# Altium PCB Grabber_DIOT.PCBDOC (part 2 of 7)
Units mm, origin at the board's own origin, x right, y up, seen from the top; angles counter-clockwise.
Board outline 221.14 x 100 mm, 4 copper layers (TopLayer, MidLayer1, Internal layer GND, Bottom Layer), stack 1.607 mm thick; 234 components, 170 nets, 1025 pads, 389 vias.
Unrouted connection lines stored in the file: 2.
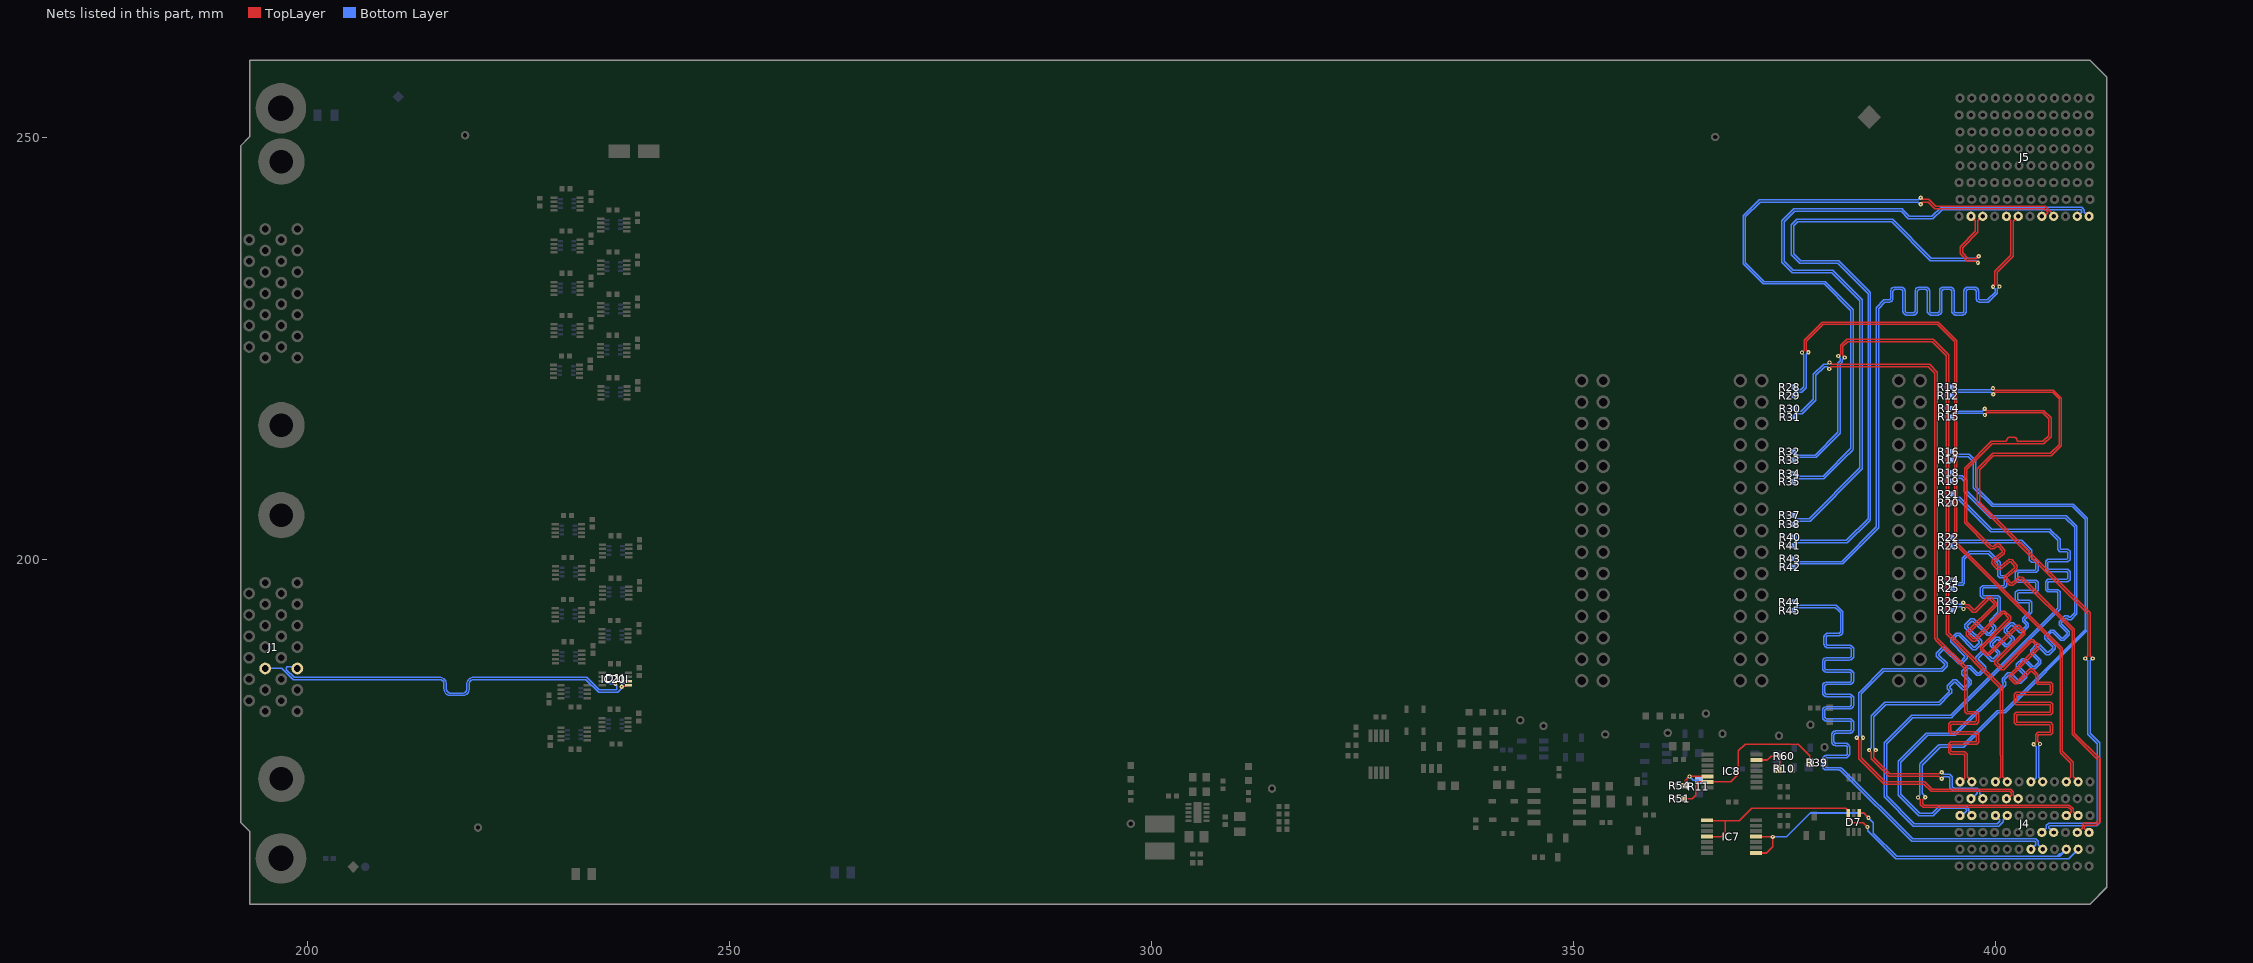
[diagram p4: the nets of this part, all layers, seen from the top]

## Part data
B1 B2 B3 B4 B5 B6 B7 B8 B9 B10 B11 B14 B15 B16: library part PLATED_HOLE0.6_PAD1.3, "Single Terminal Socket", Author="CERN DEM MR", ComponentHeight=0mm, Component Type="Standard (No BOM)", CreateDate=02.03.2016, Family="Plated Hole", HelpURL=Undefined, LatestRevisionDate=02.03.2016, Mounted=No, PackageDescription="Plated Through Hole: Hole Dia.=0.6mm Pad Dia.=1.3mm", Part Description="Plated Through Hole: Hole Dia.=0.6mm Pad Dia.=1.3mm", Part Number=PLATED_HOLE0.6_PAD1.3, Pin Count=1, Sense=No, SMD=No, Socket=No, Status=None
C1: library part CC0402_22PF_50V_5%_C0G, "Non-polarised capacitor", Case=0402, Manufacturer=GENERIC, Manufacturer1 ComponentHeight=0.55mm, Manufacturer1 Example=KEMET, Manufacturer1 Part Number=C0402C220J5GACTU, Tolerance=±5%, Voltage=50V, Author="CERN DEM JLC", Component Type=Standard, CreateDate=2007-12-03, HelpURL="\\cern.ch\dfs\Applications\Altium\Datasheets\CC0402_C0G_KEMET_(Commercial Grade).pdf", LatestRevisionDate=2007-12-03, Manufacturer Part Number=CC0402_22PF_50V_5%_C0G, Mounted=Yes, Part Description="SMD Multilayer Chip Ceramic Capacitor", Part Number=CC0402_22PF_50V_5%_C0G, Pin Count=2, Sense=No, SMD=Yes, Socket=No, Status=Preferred, TC=C0G/NP0
C2 C3 C14 C16 C17 C47A C47B C47C C47D C47E C47F C47G C47H C47I C47J C47K C47L C47M C47N C47O C47P C47Q C47R C47S C47T C47U C58 C59 C64 C65 C67: library part CC0402_100NF_16V_10%_X5R, "Non-polarised capacitor", Case=0402, Manufacturer=GENERIC, Manufacturer1 ComponentHeight=0.55mm, Manufacturer1 Example=MURATA, Manufacturer1 Part Number=GRM155R61C104KA88D, Tolerance=±10%, Voltage=16V, Author="CERN DEM JLC", Component Type=Standard, CreateDate=10.12.2013, HelpURL=\\cern.ch\dfs\Applications\Altium\Datasheets\CC0402_X5R_MURATA_GRM.pdf, LatestRevisionDate=10.12.2013, Manufacturer Part Number=CC0402_100NF_16V_10%_X5R, Mounted=Yes, Part Description="SMD Multilayer Chip Ceramic Capacitor", Part Number=CC0402_100NF_16V_10%_X5R, Pin Count=2, Sense=No, SMD=Yes, Socket=No, Status=None, TC=X5R
C9 C10: library part CC0603_1UF_25V_10%_X7R, "Non-polarised capacitor", Case=0603, Manufacturer=GENERIC, Manufacturer1 ComponentHeight=0.9mm, Manufacturer1 Example=MURATA, Manufacturer1 Part Number=GRM188R71E105KA12D, Tolerance=±10%, Voltage=25V, Author="CERN DEM JLC", Component Type=Standard, CreateDate=18.01.2011, HelpURL=\\cern.ch\dfs\Applications\Altium\Datasheets\CC0603_X7R_MURATA.pdf, LatestRevisionDate=18.01.2011, Manufacturer Part Number=CC0603_1UF_25V_10%_X7R, Mounted=Yes, Part Description="SMD Multilayer Chip Ceramic Capacitor", Part Number=CC0603_1UF_25V_10%_X7R, Pin Count=2, Sense=No, SMD=Yes, Socket=No, Status=None, TC=X7R
C11: library part CC0603_22UF_6.3V_20%_X5R, "Non-polarised capacitor", Case=0603, Manufacturer=GENERIC, Manufacturer1 ComponentHeight=0.9mm, Manufacturer1 Example=TDK, Manufacturer1 Part Number=C1608X5R0J226M080, Tolerance=±20%, Voltage=6.3V, Author="CERN DEM JLC", Component Type=Standard, CreateDate=16.12.2013, HelpURL=\\cern.ch\dfs\Applications\Altium\Datasheets\CC0603_X5R_TDK_C.pdf, LatestRevisionDate=03.12.2020, Manufacturer Part Number=CC0603_22UF_6.3V_20%_X5R, Mounted=Yes, Part Description="SMD Multilayer Chip Ceramic Capacitor", Part Number=CC0603_22UF_6.3V_20%_X5R, Pin Count=2, Sense=No, SMD=Yes, Socket=No, Status=None, TC=X5R
C12: library part CC0603_100NF_50V_10%_X7R, "Non-polarised capacitor", Case=0603, Manufacturer=GENERIC, Manufacturer1 ComponentHeight=0.87mm, Manufacturer1 Example=PHYCOMP, Manufacturer1 Part Number=223858615649, Tolerance=±10%, Voltage=50V, Author="CERN DEM JLC", Component Type=Standard, CreateDate=03.12.2007, HelpURL=\\cern.ch\dfs\Applications\Altium\Datasheets\CC0603_X7R_PHYCOMP.pdf, LatestRevisionDate=03.12.2007, Manufacturer Part Number=CC0603_100NF_50V_10%_X7R, Mounted=Yes, Part Description="SMD Multilayer Chip Ceramic Capacitor", Part Number=CC0603_100NF_50V_10%_X7R, Pin Count=2, Sense=No, SMD=Yes, Socket=No, Status=Preferred, TC=X7R
C13 C66 C68: library part CC0805_22UF_16V_10%_X5R, "Non-polarised capacitor", Case=0805, Manufacturer=GENERIC, Manufacturer1 ComponentHeight=1.35mm, Manufacturer1 Example=TDK, Manufacturer1 Part Number=C2012X5R1C226KT, Tolerance=±10%, Voltage=16V, Author="CERN DEM JLC", Component Type=Standard, CreateDate=25.10.2012, HelpURL=\\cern.ch\dfs\Applications\Altium\Datasheets\CC0805_X5R_TDK_C.pdf, LatestRevisionDate=25.10.2012, Manufacturer Part Number=CC0805_22UF_16V_10%_X5R, Mounted=Yes, Part Description="SMD Multilayer Chip Ceramic Capacitor", Part Number=CC0805_22UF_16V_10%_X5R, Pin Count=2, Sense=No, SMD=Yes, Socket=No, Status=Preferred, TC=X5R
C15: library part CC0603_1UF_16V_10%_X7R, "Non-polarised capacitor", Case=0603, Manufacturer=GENERIC, Manufacturer1 ComponentHeight=0.9mm, Manufacturer1 Example="YAGEO PHYCOMP", Manufacturer1 Part Number=223878615663, Tolerance=±10%, Voltage=16V, Author="CERN DEM JLC", Component Type=Standard, CreateDate=03.12.2007, HelpURL=\\cern.ch\dfs\Applications\Altium\Datasheets\CC0603_X7R_PHYCOMP.pdf, LatestRevisionDate=17.04.2015, Manufacturer Part Number=CC0603_1UF_16V_10%_X7R, Mounted=Yes, Part Description="SMD Multilayer Chip Ceramic Capacitor", Part Number=CC0603_1UF_16V_10%_X7R, Pin Count=2, Sense=No, SMD=Yes, Socket=No, Status=None, TC=X7R
C62: library part CAE430-540_10UF_16V_20%, "Polarised capacitor", Case=B, Manufacturer=PANASONIC, Manufacturer Part Number=EEEFK1C100AR, Tolerance=±20%, Voltage=16V, Author="CERN DEM JLC", ComponentHeight=5.8mm, Component Type=Standard, CreateDate=03.12.2007, HelpURL=\\cern.ch\dfs\Applications\Altium\Datasheets\CAE_PANASONIC_FK.pdf, LatestRevisionDate=05.11.2014, Mounted=Yes, Part Description="Aluminum Electrolytic SMT Capacitor", Part Number=CAE430-540_10UF_16V_20%, Pin Count=2, Sense=No, SMD=Yes, Socket=No, Status="Not Recommended"
D1A D1B D1C D1D D1E D1F D1G D1H D1I D1J D1K D1L D1M D1N D1O D1P D1Q D1R D1S D1T D1U: "ESD Protection Diodes Array (8kV) with Low Clamping Voltage", Manufacturer="ON SEMICONDUCTOR", Voltage=5.5V, Author="CERN DEM JLC", Bonding=No, ComponentHeight=1.75mm, Component Type=Standard, CreateDate=05.12.2012, Device=NUP4114UPXV6T1G, HelpURL=\\cern.ch\dfs\Applications\Altium\Datasheets\NUP4114UPXV6T1G.pdf, LatestRevisionDate=05.12.2012, Manufacturer Part Number=NUP4114UPXV6T1G, Mounted=Yes, PackageDescription="SOTFL (SOT666, SOT563,), 0.50mm, Pitch; 6 Pin, 1.20mm W X 1.60mm L X 0.60mm H Body, IPC Medium Density", Part Description="ESD Protection Diodes Array (8kV) with Low Clamping Voltage", Part Number=NUP4114UPXV6T1G, Pin Count=8, PressFit=No, Sense=No, SMD=Yes, Socket=No
D2 D3 D4: "Ultra Low Capacitance Double Rail-to-Rail ESD Protection Diode", Case=SOT143B, Manufacturer="NXP SEMICONDUCTORS", Voltage=5.5V, Author="CERN DEM JLC", Bonding=No, Component Type=Standard, ComponentHeight=1.1mm, CreateDate=22.03.2011, Device=PRTR5V0U2X, HelpURL=\\cern.ch\dfs\Applications\Altium\Datasheets\PRTR5V0U2X.pdf, LatestRevisionDate=22.03.2011, Manufacturer Part Number=PRTR5V0U2X, Mounted=Yes, PackageDescription="SOT143B, SOT, 1.90mm Pitch; 4 Pin, 1.30mm W X 2.90mm L X 1.10mm H body, IPC Medium Density", Part Description="Ultra Low Capacitance (1pF) Double Rail-to-Rail ESD Protection Diode (8kV)", Part Number=PRTR5V0U2X, Pin Count=4, PressFit=No, Sense=No, SMD=Yes, Socket=No
D5 D6 D9 D10: "Schottky Diode", Case=SOD323, Manufacturer=INFINEON, Power=750mA, Voltage=40V, Author="CERN DEM JLC", Bonding=No, Component Type=Standard, ComponentHeight=1.1mm, CreateDate=12.11.2014, Device=BAT165, HelpURL=\\cern.ch\dfs\Applications\Altium\Datasheets\BAT165.pdf, LatestRevisionDate=12.11.2014, Manufacturer Part Number=BAT165, Mounted=Yes, PackageDescription="Small Outline Diode (SOD-323), 1.70mm W X 1.25mm L X 1.10mm H body,  IPC Medium Density", Part Description="Medium Power AF Schottky Diode", Part Number=BAT165, Pin Count=2, PressFit=No, Sense=No, SMD=Yes, Socket=No
D7 D8: "Fivefold ESD Protection Diode Arrays", Case=SOT363, Manufacturer=NEXPERIA, Power=200W, Voltage=3.3V, Author="CERN DEM WB", Bonding=No, Component Type=Standard, ComponentHeight=1.1mm, CreateDate=05.07.2021, Device=PESD3V3L5UY, HelpURL=\\cern.ch\dfs\Applications\Altium\Datasheets\PESD3V3L5UY.pdf, LatestRevisionDate=05.07.2021, Manufacturer Part Number=PESD3V3L5UY, Mounted=Yes, PackageDescription="SOT363, SC-88, 0.65mm Pitch; 6 Pin, 1.25mm W X 2.00mm L X 1.10mm H body, IPC Medium Density", Part Description="Fivefold ESD Protection Diode Arrays (30kV)", Part Number=PESD3V3L5UY, Pin Count=6, PressFit=No, Sense=No, SMD=Yes, Socket=No
FTG21: library part FIDUCIAL_TARGET_C100-200, "Fiducial Target", Author="CERN DEM JLC", ComponentHeight=0mm, Component Type="Standard (No BOM)", CreateDate=09.02.2010, Family=Fiducial, HelpURL=Undefined, LatestRevisionDate=04.04.2012, Mounted=No, PackageDescription="Round Fiducial Target, Top Layer, 1.0mm, Top Solder 2.0mm, Keepout =2.0mm", Part Description="Round Fiducial Target, Top Layer, 1.0mm, Top Solder 2.0mm, Keepout =2.0mm", Part Number=FIDUCIAL_TARGET_C100-200, Pin Count=1, Sense=No, SMD=Yes, Socket=No, Status=None
FTG22 FTG24: library part FIDUCIAL_TARGET_S100-200, "Fiducial Target", Author="CERN DEM JLC", ComponentHeight=0mm, Component Type="Standard (No BOM)", CreateDate=09.02.2010, Family=Fiducial, HelpURL=Undefined, LatestRevisionDate=04.04.2012, Mounted=No, PackageDescription="Square Fiducial Target, Top Layer, 1.0mm, Top Solder 2.0mm, Keepout =2.0mm", Part Description="Square Fiducial Target, Top Layer, 1.0mm, Top Solder 2.0mm, Keepout =2.0mm", Part Number=FIDUCIAL_TARGET_S100-200, Pin Count=1, Sense=No, SMD=Yes, Socket=No, Status=None
FTG23: library part FIDUCIAL_TARGET_S200-400, "Fiducial Target", Author="CERN DEM JLC", ComponentHeight=0mm, Component Type="Standard (No BOM)", CreateDate=02.06.2008, Family=Fiducial, HelpURL=Undefined, LatestRevisionDate=04.04.2012, Mounted=No, PackageDescription="Square Fiducial Target, Top Layer, 2.0mm, Top Solder 4.0mm, Keepout =4.0mm", Part Description="Square Fiducial Target, Top Layer, 2.0mm, Top Solder 4.0mm, Keepout =4.0mm", Part Number=FIDUCIAL_TARGET_S200-400, Pin Count=1, Sense=No, SMD=Yes, Socket=No, Status=None
IC1 IC24 IC26: "1.7V-5.5V, 2K I2C Serial EEPROM With EUI-48 Node Identity", Case=SOT23-5, Manufacturer="MICROCHIP TECHNOLOGY", Author="CERN DEM MR", Bonding=No, ComponentHeight=1.45mm, Component Type=Standard, CreateDate=31.03.2016, Device=24AA02E48T-I/OT, HelpURL=\\cern.ch\dfs\Applications\Altium\Datasheets\24AA02E48T-I-OT.pdf, LatestRevisionDate=31.03.2016, Manufacturer Part Number=24AA02E48T-I/OT, Mounted=Yes, PackageDescription="SOT, 0.95mm pitch; 5 pin, 1.60mm W X 2.90mm L X 1.45mm H body, IPC Medium Density", Part Description="1.7V-5.5V, 2K I2C Serial EEPROM With EUI-48 Node Identity", Part Number=24AA02E48T-I/OT, Pin Count=5, PressFit=No, Sense=No, SMD=Yes, Socket=No
IC2: "Digital Temperature Sensor and Thermal Watchdog with Two-Wire Interface", Case=SSOP8, Manufacturer="TEXAS INSTRUMENTS", Author="CERN DEM JLC", Bonding=No, Component Type=Standard, ComponentHeight=1.09mm, CreateDate=15.10.2012, Device=LM75AIMM/NOPB, HelpURL=\\cern.ch\dfs\Applications\Altium\Datasheets\LM75AIMM-NOPB.pdf, LatestRevisionDate=15.10.2012, Manufacturer Part Number=LM75AIMM/NOPB, Mounted=Yes, PackageDescription="SOP, 0.65mm pitch; 8 pin,3.00mm W X 3.00mm L X 1.09mm H bodyI, PC Medium Density", Part Description="-25° to +100°C ±2°C Digital Temperature Sensor and Thermal Watchdog with Two-Wire Interface", Part Number=LM75AIMM/NOPB, Pin Count=8, PressFit=No, Sense=No, SMD=Yes, Socket=No
IC6: "500mA Peak Output LDO Regulator", Case=SOT23-5, Manufacturer="MICROCHIP TECHNOLOGY", Author="CERN DEM WB", Bonding=No, Component Type=Standard, ComponentHeight=1.45mm, CreateDate=2019-04-16, Device=MIC5219-3.3YM5, HelpURL=\\cern.ch\dfs\Applications\Altium\Datasheets\MIC5219-3.3YM5.pdf, LatestRevisionDate=2019-04-16, Manufacturer Part Number=MIC5219-3.3YM5, Mounted=Yes, PackageDescription="SOT, 0.95mm pitch; 5 pin, 1.60mm W X 2.90mm L X 1.45mm H body, IPC Medium Density", Part Description="3.3V 500mA Peak Output Low Drop-Out  (LDO) Regulator", Part Number=MIC5219-3.3YM5, Pin Count=5, PressFit=No, Sense=No, SMD=Yes, Socket=No
IC7 IC8: Case=TSSOP14, Manufacturer="NXP SEMICONDUCTORS", Author="CERN DEM JLC", Bonding=No, Component Type=Standard, ComponentHeight=1.1mm, Device=74HC4066PW, HelpURL=\\cern.ch\dfs\Applications\Altium\Datasheets\74HC4066PW.pdf, Manufacturer Part Number=74HC4066PW, Mounted=Yes, Part Description="Quad Single-Pole Single-Throw Analog Switch", Part Number=74HC4066PW, Pin Count=14, PressFit=No, SMD=Yes, Socket=No
  IC7: CreateDate=19.11.2014, LatestRevisionDate=19.11.2014, PackageDescription="SOP, 0.65mm Pitch; 14 Pin, 4.40mm W X 5.00mm L X 1.20mm H body, IPC Medium Density", Sense=No
  IC8: CreateDate=2014-11-19, LatestRevisionDate=2014-11-19, PackageDescription="SOP, 14-Leads, Body 4.4x5mm (max), Pitch 0.65mm, IPC Medium Density", Table="Standard Logic"
IC9: "LinCMOS Timer", Case=SOIC8, Manufacturer="TEXAS INSTRUMENTS", Author="CERN DEM JMW", Bonding=No, Component Type=Standard, ComponentHeight=1.75mm, CreateDate=23.08.2016, Device=TLC555ID, HelpURL=\\cern.ch\dfs\Applications\Altium\Datasheets\TLC555ID.pdf, LatestRevisionDate=23.08.2016, Manufacturer Part Number=TLC555ID, Mounted=Yes, PackageDescription="SOIC 8, Pitch 1.27mm, Body 4x5mm, IPC Medium Density", Part Description="LinCMOS Timer", Part Number=TLC555ID, Pin Count=8, PressFit=No, Sense=No, SMD=Yes, Socket=No
IC20A IC20B IC20C IC20D IC20E IC20F IC20G IC20H IC20I IC20J IC20K IC20L IC20M IC20N IC20O IC20P IC20Q IC20R IC20S IC20T IC20U: "LVDS Single Port High Speed Repeater", Case=TSSOP8, Manufacturer="FAIRCHILD SEMICONDUCTOR", Author="CERN DEM JLC", Bonding=No, ComponentHeight=0.8mm, Component Type=Standard, CreateDate=08.11.2016, Device=FIN1101K8X, HelpURL=\\cern.ch\dfs\Applications\Altium\Datasheets\FIN1101K8X.pdf, LatestRevisionDate=08.11.2016, Manufacturer Part Number=FIN1101K8X, Mounted=Yes, PackageDescription="SOP, 0.50mm Pitch; 8 pin, 2.30mm W X 2.00mm L X 0.90mm H body, PC Medium Density", Part Description="LVDS Single Port High Speed Repeater", Part Number=FIN1101K8X, Pin Count=8, PressFit=No, Sense=No, SMD=Yes, Socket=No
IC27: "4.75-28VDC to 1-6VDC, 500mA Step-Down Converter With Sleep Mode", Case=SON10, Manufacturer="TEXAS INSTRUMENTS", Author="CERN DEM JMW", Bonding=No, ComponentHeight=0.8mm, Component Type=Standard, CreateDate=11.08.2015, Device=TPS62175DQC, HelpURL=\\cern.ch\dfs\Applications\Altium\Datasheets\TPS62175DQC.pdf, LatestRevisionDate=11.08.2015, Manufacturer Part Number=TPS62175DQC, Mounted=Yes, PackageDescription="SON, 10-Leads, Body 2x3mm, Pitch 0.5mm, Thermal Pad 0.94x2.5mm, IPC Medium Density", Part Description="4.75-28VDC to 1-6VDC, 500mA Step-Down Converter With Sleep Mode", Part Number=TPS62175DQC, Pin Count=11, PressFit=No, Sense=No, SMD=Yes, Socket=No
J1 J2: library part 3M_N10226-5212PC, "Connector Mini D Ribbon (MDR) 26 Female", Manufacturer=3M, Author="CERN DEM JLC", Component Type=Standard, ComponentHeight=9.4mm, CreateDate=18.11.2008, Family="MDR 26", HelpURL=\\cern.ch\dfs\Applications\Altium\Datasheets\3M_N10226-5212PC.pdf, LatestRevisionDate=14.10.2009, Manufacturer Part Number=N10226-5212PC, Mounted=Yes, Part Description="26 contacts, Mini D Ribbon (MDR), .050\" Boardmount Through-hole Right Angle Receptacle-Shielded, Diecast Body, 102 Series", Part Number=N10226-5212PC, Pin Count=28, PressFit=No, Sense=No, SMD=No, Socket=No, Status=None
J3 J14 J24: library part 3M_N2530-6002RB, "30 Contacts - Straight .100'' x .100'' Low Profile Four-Wall Header, 2500 Series", Manufacturer=3M, Author="CERN DEM JLC", ComponentHeight=10.03mm, Component Type=Standard, CreateDate=11.02.2009, Family="Header 30", HelpURL=\\cern.ch\dfs\Applications\Altium\Datasheets\3M_N2530-6002RB.pdf, LatestRevisionDate=11.08.2009, Manufacturer Part Number=N2530-6002RB, Mounted=Yes, Part Description="30 Contacts - Straight .100'' x .100'' Low Profile Four-Wall Header, 2500 Series", Part Number=3M_N2530-6002RB, Pin Count=30, PressFit=No, Sense=No, SMD=No, Socket=No, Status=None
J4: library part AMPHENOL_10052825-101LF, "72 Contacts Header, 6 Columns, 4 Pairs per Column", Manufacturer=AMPHENOL, Part Number=10052825-101LF
J5: library part AMPHENOL_10052838-101LF, "96 Contacts Header, 8 Columns, 4 Pairs per Column", Manufacturer=AMPHENOL, Part Number=10052838-101LF
L2: library part IND_10UH_10%_MURATA-PS_8400, "Inductor With Core", Manufacturer="MURATA POWER SOLUTIONS", Manufacturer Part Number=84103C, Power=950mA, Resistance=0.24R, Tolerance=±10%, Author="CERN DEM JLC", ComponentHeight=2.9mm, Component Type=Standard, CreateDate=02.07.2012, HelpURL=\\cern.ch\dfs\Applications\Altium\Datasheets\IND_MURATA-PS_8400.pdf, LatestRevisionDate=02.07.2012, Mounted=Yes, Part Description="Miniature Surface Mount Power Inductor (8400 Serie)", Part Number=IND_10UH_10%_MURATA-PS_8400, Pin Count=2, Sense=No, SMD=Yes, Socket=No, Status=None
LD1 LD5 LD6 LD7 LD8: library part LED_KINGBRIGHT_KPH-1608CGCK, "LED Green 1C 2A", Manufacturer=KINGBRIGHT, Manufacturer Part Number=KPH-1608CGCK, Author="CERN DEM JLC", Bonding=No, Color=Green, Component Type=Standard, ComponentHeight=0.65mm, CreateDate=03.07.2017, HelpURL=\\cern.ch\dfs\Applications\Altium\Datasheets\LED_KINGBRIGHT_KPH-1608CGCK.pdf, LatestRevisionDate=03.07.2017, Mounted=Yes, PackageDescription="SMT Green LED, Case 0603, Body L 1.6 x W 0.8mm H 0.65mm", Part Description="SMD Green LED, Case 1.6mmX0.8mm(0603), 0.65mm Thickness", Part Number=KPH-1608CGCK, Pin Count=2, PressFit=No, Sense=No, SMD=Yes, Socket=No
M3 M4: library part PLATED_HOLE3.0_PAD6.0, "Single Terminal Socket", Author="CERN DEM JLC", Component Type="Standard (No BOM)", ComponentHeight=0mm, CreateDate=26.05.2008, Family="Plated Hole", LatestRevisionDate=26.05.2008, Mounted=No, PackageDescription="Plated Through Hole: Hole Dia.=3.0mm Pad Dia.=6.0mm", Part Description="Plated Through Hole: Hole Dia.=3.0mm Pad Dia.=6.0mm", Part Number=PLATED_HOLE3.0_PAD6.0, Pin Count=1, SMD=No, Socket=No, Status=None, Table=Pads
R1 R50 R51 R52 R53 R54 R60 R64 R65 R66 R71: library part R0402_10K_1%_0.0625W_100PPM, "Resistor - 1%", Case=0402, Manufacturer=GENERIC, Manufacturer1 ComponentHeight=0.4mm, Manufacturer1 Example="YAGEO PHYCOMP", Manufacturer1 Part Number=232270671003L, Power=0.0625W, Tolerance=±1%, Author="CERN DEM JLC", Component Type=Standard, CreateDate=03.12.2007, HelpURL=\\cern.ch\dfs\Applications\Altium\Datasheets\R0402_Phycomp_RC0402.pdf, LatestRevisionDate=17.10.2012, Manufacturer Part Number=R0402_10K_1%_0.0625W_100PPM, Mounted=Yes, Part Description="General Purpose Thick Film Chip Resistor", Part Number=R0402_10K_1%_0.0625W_100PPM, Pin Count=2, Sense=No, SMD=Yes, Socket=No, TC=±100ppm/°C
  R1 R50 R51 R52 R53 R54 R60 R64 R65 R71: Status="Not recommended"
  R66: PressFit=No, Status="Not Recommended"
R2 R3 R4 R7: library part R0402_470R_1%_0.0625W_100PPM, "Resistor - 1%", Case=0402, Manufacturer=GENERIC, Manufacturer1 ComponentHeight=0.4mm, Manufacturer1 Example="YAGEO PHYCOMP", Manufacturer1 Part Number=232270674701L, Power=0.0625W, Tolerance=±1%, Author="CERN DEM JLC", Component Type=Standard, CreateDate=03.12.2007, HelpURL=\\cern.ch\dfs\Applications\Altium\Datasheets\R0402_Phycomp_RC0402.pdf, LatestRevisionDate=17.10.2012, Manufacturer Part Number=R0402_470R_1%_0.0625W_100PPM, Mounted=Yes, Part Description="General Purpose Thick Film Chip Resistor", Part Number=R0402_470R_1%_0.0625W_100PPM, Pin Count=2, PressFit=No, Sense=No, SMD=Yes, Socket=No, Status="Not Recommended", TC=±100ppm/°C
R5: library part R0805_1M1_1%_0.125W_100PPM, "Resistor - 1%", Case=0805, Manufacturer=GENERIC, Manufacturer1 ComponentHeight=0.6mm, Manufacturer1 Example="NIC COMPONENT", Manufacturer1 Part Number=NRC10F1104TRF, Author="CERN DEM JLC", Component Type=Standard, CreateDate=03/12/2007, HelpURL=\\cern.ch\dfs\Applications\Altium\Datasheets\R0805_NIC_NRC.pdf, LatestRevisionDate=13/03/2008, Manufacturer Part Number=R0805_1M1_1%_0.125W_100PPM, Mounted=Yes, Part Description="General Purpose Thick Film Chip Resistor", Part Number=R0805_1M1_1%_0.125W_100PPM, Pin Count=2, PressFit=No, Sense=No, SMD=Yes, Socket=No, Status=Preferred
R6 R49: library part "R0805_10M_1%_0.125W_100PPM_VISHAY_CRCW e3", "150V, Standard Thick Film Chip Resistor", Case=0805, Manufacturer="VISHAY DALE", Manufacturer Part Number=CRCW080510M0FKEA, Part Number=R0805_10M_1%_0.125W_100PPM, Power=0.125W, Tolerance=±1%, Author="CERN DEM BC", Component Type=Standard, ComponentHeight=0.5mm, CreateDate=2019-11-12, HelpURL="\\cern.ch\dfs\Applications\Altium\Datasheets\R0805_VISHAY_CRCW e3.pdf", LatestRevisionDate=2019-11-12, Mounted=Yes, Part Description="150V, Standard Thick Film Chip Resistor", Pin Count=2, PressFit=No, Sense=No, SMD=Yes, Socket=No, Status=None, TC=±100ppm/°C
R8 R9 R131A R131B R131C R131D R131E R131F R131G R131H R131I R131J R131K R131L R131M R131N R131O R131P R131Q R131R R131S R131T R131U: library part R0402_100R_1%_0.1W_100PPM, "Resistor - 1%", Case=0402, Manufacturer=GENERIC, Manufacturer1 ComponentHeight=0.4mm, Manufacturer1 Example=PANASONIC, Manufacturer1 Part Number=ERJ2RKF1000X, Manufacturer Part Number=R0402_100R_1%_0.1W_100PPM_50V, Power=0.1W, Tolerance=±1%, Voltage=50V, Author="CERN DEM JLC", Component Type=Standard, CreateDate=12.12.2013, HelpURL=\\cern.ch\dfs\Applications\Altium\Datasheets\R0402_PANASONIC_ERJ2RK.pdf, LatestRevisionDate=03.03.2015, Mounted=Yes, Part Description="General Purpose Thick Film Chip Resistor", Part Number=R0402_100R_1%_0.1W_100PPM, Pin Count=2, Sense=No, SMD=Yes, Socket=No, Status="Not recommended", TC=±100ppm/°C
R10 R11 R39: library part R0603_33R_1%_0.1W_100PPM, "Resistor - 1%", Case=0603, Manufacturer=GENERIC, Manufacturer1 ComponentHeight=0.55mm, Manufacturer1 Example="NIC COMPONENT", Manufacturer1 Part Number=NRC06F33R0TRF, Power=0.1W, Tolerance=±1%, Author="CERN DEM JLC", Component Type=Standard, CreateDate=03.12.2007, HelpURL=\\cern.ch\dfs\Applications\Altium\Datasheets\R0603_NIC_NRC.pdf, LatestRevisionDate=13.03.2008, Manufacturer Part Number=R0603_33R_1%_0.1W_100PPM, Mounted=Yes, Part Description="General Purpose Thick Film Chip Resistor", Part Number=R0603_33R_1%_0.1W_100PPM, Pin Count=2, PressFit=No, Sense=No, SMD=Yes, Socket=No, Status=Preferred, TC=±100ppm/°C
R12 R13 R14 R15 R16 R17 R18 R19 R20 R21 R22 R23 R24 R25 R26 R27 R28 R29 R30 R31 R32 R33 R34 R35 R37 R38 R40 R41 R42 R43 R44 R45 R47 R61 R63 R67 R68: library part R0402_0R_JUMPER, "Resistor", Case=0402, Manufacturer=GENERIC, Manufacturer1 ComponentHeight=0.4mm, Manufacturer1 Example="YAGEO PHYCOMP", Manufacturer1 Part Number=232270591001L, Author="CERN DEM JLC", Component Type=Standard, CreateDate=03.12.2007, HelpURL=\\cern.ch\dfs\Applications\Altium\Datasheets\R0402_Phycomp_RC0402.pdf, LatestRevisionDate=17.10.2012, Manufacturer Part Number=R0402_0R_JUMPER, Mounted=Yes, Part Description="1A (0.05R Max DC Resistance) Zero Ohm Jumper", Part Number=R0402_0R_JUMPER, Pin Count=2, Sense=No, SMD=Yes, Socket=No, Status="Not recommended"
R36 R46: library part "Resistor - 1%", "Resistor - 1%", Tolerance=1%
R48: library part R0402_200R_1%_0.0625W_100PPM, "Resistor - 1%", Case=0402, Manufacturer=GENERIC, Manufacturer1 ComponentHeight=0.4mm, Manufacturer1 Example="YAGEO PHYCOMP", Manufacturer1 Part Number=232270672001L, Power=0.0625W, Tolerance=±1%, Author="CERN DEM JLC", Component Type=Standard, CreateDate=2007-12-03, HelpURL=\\cern.ch\dfs\Applications\Altium\Datasheets\R0402_Phycomp_RC0402.pdf, LatestRevisionDate=2012-10-17, Manufacturer Part Number=R0402_200R_1%_0.0625W_100PPM, Mounted=Yes, Part Description="General Purpose Thick Film Chip Resistor", Part Number=R0402_200R_1%_0.0625W_100PPM, Pin Count=2, PressFit=No, Sense=No, SMD=Yes, Socket=No, Status="Not Recommended", TC=±100ppm/°C
R55 R62: library part R0603_2K7_1%_0.1W_100PPM, "Resistor - 1%", Case=0603, Manufacturer=GENERIC, Manufacturer1 ComponentHeight=0.55mm, Manufacturer1 Example="YAGEO PHYCOMP", Manufacturer1 Part Number=RC0603FR-072K7L, Power=0.1W, Tolerance=±1%, Author="CERN DEM JLC", Component Type=Standard, CreateDate=02.05.2011, HelpURL=\\cern.ch\dfs\Applications\Altium\Datasheets\R0603_PHYCOMP_RC0603.pdf, LatestRevisionDate=02.05.2011, Manufacturer Part Number=R0603_2K7_1%_0.1W_100PPM, Mounted=Yes, Part Description="General Purpose Thick Film Chip Resistor", Part Number=R0603_2K7_1%_0.1W_100PPM, Pin Count=2, PressFit=No, Sense=No, SMD=Yes, Socket=No, Status=Preferred, TC=±100ppm/°C
R56 R57 R58 R59: library part R0603_0R_JUMPER, "Resistor", Case=0603, Manufacturer=GENERIC, Manufacturer1 ComponentHeight=0.55mm, Manufacturer1 Example="NIC COMPONENT", Manufacturer1 Part Number=NRC06Z0, Author="CERN DEM JLC", Component Type=Standard, CreateDate=03.12.2007, HelpURL=\\cern.ch\dfs\Applications\Altium\Datasheets\R0603_NIC_NRC.pdf, LatestRevisionDate=13.03.2008, Manufacturer Part Number=R0603_0R_JUMPER, Mounted=Yes, Part Description="1A (0.05R Max DC Resistance) Zero Ohm Jumper", Part Number=R0603_0R_JUMPER, Pin Count=2, PressFit=No, Sense=No, SMD=Yes, Socket=No, Status=Preferred
R121: library part R0603_270K_1%_0.1W_100PPM, "Resistor - 1%", Case=0603, Manufacturer=GENERIC, Manufacturer1 ComponentHeight=0.55mm, Manufacturer1 Example="NIC COMPONENT", Manufacturer1 Part Number=NRC06F2703TRF, Power=0.1W, Tolerance=±1%, Author="CERN DEM JLC", Component Type=Standard, CreateDate=03.12.2007, HelpURL=\\cern.ch\dfs\Applications\Altium\Datasheets\R0603_NIC_NRC.pdf, LatestRevisionDate=13.03.2008, Manufacturer Part Number=R0603_270K_1%_0.1W_100PPM, Mounted=Yes, Part Description="General Purpose Thick Film Chip Resistor", Part Number=R0603_270K_1%_0.1W_100PPM, Pin Count=2, Sense=No, SMD=Yes, Socket=No, Status=Preferred, TC=±100ppm/°C
R122: library part R0603_82K_1%_0.1W_100PPM, "Resistor - 1%", Case=0603, Manufacturer=GENERIC, Manufacturer1 ComponentHeight=0.55mm, Manufacturer1 Example="NIC COMPONENT", Manufacturer1 Part Number=NRC06F8202TRF, Power=0.1W, Tolerance=±1%, Author="CERN DEM JLC", Component Type=Standard, CreateDate=03.12.2007, HelpURL=\\cern.ch\dfs\Applications\Altium\Datasheets\R0603_NIC_NRC.pdf, LatestRevisionDate=13.03.2008, Manufacturer Part Number=R0603_82K_1%_0.1W_100PPM, Mounted=Yes, Part Description="General Purpose Thick Film Chip Resistor", Part Number=R0603_82K_1%_0.1W_100PPM, Pin Count=2, Sense=No, SMD=Yes, Socket=No, Status=Preferred, TC=±100ppm/°C
SCREW1 SCREW2 SCREW3 SCREW4: library part MECH_MDR_screw_lock, "VHDCI Female Screw Lock", Manufacturer=3M, Author=GK, Component Type=Mechanical, ComponentHeight=5.48mm, CreateDate=10.09.2013, HelpURL=\\cern.ch\dfs\Applications\Altium\Datasheets\TYCO_749087-2.pdf, LatestRevisionDate=10.09.2013, Manufacturer Part Number=3341-31, Mounted=Yes, PackageDescription="MDR Female Screw Locks, Thread Size: M2.5", Part Description="MDR Female Screw Locks, Thread Size: M2.5", Part Number=3341-31, Pin Count=0, PressFit=No, Sense=No, SMD=No, Socket=No, Status=None
T1 T2 T3 T4: "N-CHANNEL MOSFET WITH DIODE", Case=SOT23-3, Manufacturer="ON SEMICONDUCTOR", Manufacturer Part Number=BSS138L, Author="CERN DEM JLC", Bonding=No, Component Type=Standard, ComponentHeight=1.11mm, CreateDate=23.03.2009, Device=BSS138LT1G, HelpURL=\\cern.ch\dfs\Applications\Altium\Datasheets\BSS138LT1G.pdf, LatestRevisionDate=25.05.2022, Mounted=Yes, PackageDescription="SOT23, 0.95mm Pitch; 3 Pin, 1.40mm W X 3.00mm L X 1.10mm H body, IPC Medium Density", Part Description="50V, 200mA N-Channel Enhancement Mode Field-Effect Transistor", Part Number=BSS138LT1G, Pin Count=3, PressFit=No, Sense=No, SMD=Yes, Socket=No

## Via types
v1: diameter 0.5, hole 0.2, TopLayer to Bottom Layer, tented both sides, 374 vias
v2: diameter 0.8, hole 0.5, TopLayer to Bottom Layer, tented both sides, 15 vias

## Nets (pads, with @x,y where several pads share a name; then routed paths per layer and width w, separated by ;. In a path a pad name is that pad's centre, name@x,y a point inside that pad or via, vN(x,y) a via of type N, cw(c..) or ccw(c..) an arc to the next point about the centre after c; other vN are vias at no path point)
BGA0: IC8.6 R10.2 R60.2 | length 4.5
  TopLayer w0.203: IC8.6@371.707,176.232 373.007,176.232 373.457,176.682 R60.2@374.386,176.682 ; R10.2@374.232,175.182 374.481,175.431 374.481,176.601 R60.2@374.562,176.682
BGA1: IC8.12 R11.2 R54.2 | length 4.8
  TopLayer w0.152: R54.2@363.077,173.189 363.257,173.369 363.257,173.758 v1(363.781,174.282) IC8.12@365.907,174.282
  Bottom Layer w0.152: v1(363.781,174.282) 364.206,173.857 R11.2@364.907,173.857
BGA2: IC8.13 R39.2 R51.2 | length 21.1
  TopLayer w0.152: 363.407,171.632 364.107,171.632 364.507,172.032 364.507,173.232 364.907,173.632 IC8.13@365.907,173.632 368.682,173.632 369.582,174.532 369.582,177.307 370.407,178.132 376.657,178.132 378.032,176.757 R39.2@378.032,175.907
BP_I2C.SCL: D7.3 IC7.8 IC7.11 J4.B2 | length 52
  TopLayer w0.152: IC7.8@365.857,169.107 365.918,169.047 368.01,169.047 ; IC7.11@365.907,167.157 367.515,167.157 368.01,167.652 368.01,169.047 ; v1(384.857,168.307) 384.353,168.811 383.055,168.811 382.617,169.248 382.617,170.197 382.483,170.331 382.476,170.331 382.297,170.51 371.131,170.51 369.668,169.047 368.01,169.047
  Bottom Layer w0.152: v1(384.857,168.307) 384.924,168.241 384.924,167.835 388.206,164.553 408.728,164.553 J4.B2@409.832,165.657
BP_I2C.SDA: D7.1 IC7.1 IC7.4 J4.C2 | length 47.3
  TopLayer w0.152: D7.1@383.907,169.932 383.932,169.957 384.407,169.957 v1(384.982,169.382)
  TopLayer w0.203: IC7.1@371.657,165.207 372.882,165.207 373.637,165.962 v1(373.637,167.127) 373.606,167.157 IC7.4@371.657,167.157
  Bottom Layer w0.152: v1(384.982,169.382) 385.582,168.782 385.582,167.572 388.322,164.832 407.644,164.832 408.432,165.62 J4.C2@408.432,165.657 ; 407.349,164.831 407.672,165.154 407.835,165.154 408.338,165.657 J4.C2@408.38,165.657
  Bottom Layer w0.203: v1(373.637,167.127) 375.276,167.127 378.107,169.957 384.407,169.957 v1(384.982,169.382)
BP_IO.LVDS_N0: J4.E3 R12.2 | length 84.9
  TopLayer w0.152: v1(399.764,219.563) 399.806,219.563 400.028,219.784 406.794,219.784 407.565,219.013 407.565,213.61 406.535,212.58 399.684,212.58 397.878,210.773 397.878,206.667 410.973,193.571 410.973,188.572 410.665,188.263 v1(410.665,188.253)
  Bottom Layer w0.152: R12.2@394.92,219.434 394.92,219.454 395.133,219.668 395.153,219.668 395.293,219.807 399.501,219.807 399.746,219.563 v1(399.764,219.563) ; J4.E3@405.532,167.657 405.591,167.657 406.06,168.126 406.06,168.492 406.323,168.754 411.949,168.754 412.111,168.917 412.111,178.165 410.964,179.312 410.964,187.973 410.684,188.253 v1(410.665,188.253)
BP_IO.LVDS_N1: J4.B3 R15.2 | length 84.8
  TopLayer w0.152: v1(398.78,217.125) 399.014,217.36 405.667,217.36 406.337,216.69 406.337,214.659 405.654,213.977 404.351,213.977 402.802,213.977 cw(c402.802,214.21) 402.569,214.21 402.569,214.217 ccw(c402.335,214.217) 402.335,214.451 401.634,214.451 ccw(c401.634,214.217) 401.4,214.217 401.4,214.21 cw(c401.167,214.21) 401.167,213.977 401.09,213.977 399.553,213.977 396.546,210.969 396.382,210.806 396.382,204.357 399.264,201.475 399.419,201.32 399.463,201.276 399.763,201.243 399.82,201.243 400.253,201.589 400.381,201.575 400.838,201.004 400.824,200.876 399.675,199.955 399.635,199.915 399.602,199.615 399.602,199.558 400.167,198.852 400.207,198.812 400.507,198.779 400.564,198.779 401.745,199.726 401.874,199.712 402.331,199.141 402.317,199.012 401.168,198.091 401.128,198.051 401.095,197.751 401.095,197.695 401.66,196.989 401.7,196.949 402,196.916 402.057,196.916 402.97,197.647 403.107,197.632 403.235,197.504 409.111,191.628 409.111,179.308 409.275,179.145 412.164,176.255 412.164,169.064 411.89,168.789 410.581,168.789 410.292,168.5 410.292,168.126 409.824,167.657 J4.B3@409.732,167.657
  Bottom Layer w0.152: R15.2@394.945,216.918 394.945,216.938 395.158,217.152 395.178,217.152 395.324,217.298 398.516,217.298 398.78,217.035 v1@398.87,217.035
BP_IO.LVDS_N2: J4.C4 R17.2 | length 84.1
  TopLayer w0.152: v1(390.863,171.783) 390.89,171.783 391.152,171.521 391.152,170.933 391.46,170.625 408.688,170.625 408.992,170.321 408.992,170.111 408.539,169.657 J4.C4@408.432,169.657
  Bottom Layer w0.152: v1(390.863,171.783) 390.863,171.877 391.069,172.083 391.069,172.277 391.067,172.278 391.067,175.505 391.066,175.507 391.066,175.741 391.148,175.824 393.285,177.961 393.29,177.961 393.366,178.037 396.19,178.037 400.249,182.096 401.055,182.096 410.657,191.698 410.657,204.753 409.128,206.282 399.662,206.282 397.432,208.512 397.432,211.56 396.808,212.184 395.303,212.184 395.168,212.049 395.158,212.049 R17.2@394.945,211.835
BP_IO.LVDS_N3: J4.L4 R19.2 | length 83.6
  Bottom Layer w0.152: R19.2@394.945,209.291 395.158,209.505 395.158,209.549 395.248,209.638 396.001,209.638 396.363,209.276 396.363,208.026 396.527,207.862 399.482,204.907 408.32,204.907 409.414,203.813 409.414,193.85 409.414,193.662 408.907,193.154 408.778,193.154 408.607,193.325 408.246,193.325 407.565,192.644 407.565,192.283 408.524,191.324 408.524,191.195 408.007,190.678 407.878,190.678 406.919,191.637 406.558,191.637 405.877,190.956 405.877,190.595 406.836,189.636 406.836,189.507 406.319,188.989 406.189,188.989 405.23,189.948 404.869,189.948 404.189,189.267 404.189,188.907 405.148,187.948 405.148,187.818 404.63,187.301 404.501,187.301 403.542,188.26 403.181,188.26 402.5,187.579 402.5,187.218 403.459,186.259 403.459,186.13 402.942,185.613 402.813,185.613 401.854,186.572 401.493,186.572 400.812,185.891 400.812,185.53 400.983,185.359 400.983,185.23 400.871,185.118 395.173,179.421 391.871,179.421 391.861,179.412 388.516,176.066 388.516,172.083 388.597,172.001 389.641,170.957 390.786,169.813 390.949,169.649 392.679,169.649 392.761,169.731 392.997,169.967 393.547,170.516 396.448,170.516 396.618,170.347 396.618,170.22 396.055,169.657 J4.L4@395.832,169.657
BP_IO.LVDS_N4: J4.I4 R21.2 | length 81.9
  Bottom Layer w0.152: R21.2@394.945,207.717 395.158,207.503 395.158,207.454 395.248,207.364 395.825,207.364 395.989,207.201 399.603,203.587 406.503,203.587 406.667,203.423 407.528,202.562 407.692,202.398 407.692,201.457 407.692,201.299 407.783,201.208 408.625,201.208 408.88,200.953 408.88,199.99 408.625,199.735 406.337,199.735 406.245,199.643 406.245,198.912 406.337,198.82 408.625,198.82 408.88,198.565 408.88,197.602 408.625,197.347 406.349,197.347 406.258,197.256 406.258,196.524 406.349,196.433 407.437,196.433 407.692,196.177 407.692,194.128 407.133,193.569 394.991,181.427 394.827,181.263 390.238,181.263 387.132,178.157 387.132,171.982 390.42,168.695 400.251,168.695 400.56,169.003 400.56,169.13 J4.I4@400.032,169.657
BP_IO.LVDS_N5: J4.K5 R23.2 | length 84.5
  TopLayer w0.152: v1(385.065,177.406) 385.065,177.398 385.319,177.143 385.319,176.393 385.483,176.229 386.623,175.089 386.786,174.926 387.394,174.318 393.337,174.318 393.639,174.017 v1(393.66,174.017)
  Bottom Layer w0.152: v1(385.065,177.406) 385.065,177.415 385.319,177.669 385.319,181.484 385.483,181.648 386.755,182.92 386.918,183.083 393.308,183.083 394.45,184.225 394.562,184.337 394.562,184.466 394.346,184.683 394.346,185.044 395.026,185.725 395.387,185.725 396.266,184.846 396.396,184.846 396.913,185.363 396.913,185.492 396.034,186.371 396.034,186.732 396.715,187.413 397.076,187.413 397.955,186.534 398.084,186.534 398.601,187.051 398.601,187.18 397.722,188.059 397.722,188.42 398.403,189.101 398.764,189.101 399.643,188.222 399.772,188.222 400.289,188.739 400.289,188.869 399.41,189.748 399.41,190.108 400.091,190.789 400.452,190.789 401.331,189.91 401.46,189.91 401.978,190.428 401.978,190.557 401.099,191.436 401.099,191.797 401.78,192.478 402.14,192.478 403.019,191.599 403.149,191.599 403.666,192.116 403.666,192.245 403.248,192.663 403.248,193.024 403.46,193.236 404.057,193.832 404.057,194.637 404.057,194.795 403.966,194.886 402.664,194.886 402.409,195.141 402.409,196.104 402.664,196.359 404.74,196.359 404.832,196.451 404.832,197.182 404.74,197.274 402.664,197.274 402.409,197.529 402.409,198.492 402.664,198.747 404.74,198.747 404.832,198.838 404.832,199.57 404.74,199.661 404.312,199.661 404.057,199.917 404.057,200.357 404.057,200.957 403.039,201.975 395.254,201.975 395.172,201.893 395.158,201.893 394.945,201.679 R23.2@394.945,201.659 ; v1(393.66,174.017) 393.693,174.017 393.923,174.246 394.522,174.246 394.639,174.129 394.639,172.945 394.841,172.742 394.932,172.651 395.021,172.562 397.749,172.562 397.881,172.43 397.881,172.304 397.234,171.657 J4.K5@397.132,171.657
BP_IO.LVDS_N6: J4.H5 R25.2 | length 84.5
  TopLayer w0.152: v1(383.591,178.876) 383.591,178.855 383.833,178.613 383.833,176.391 383.996,176.227 386.702,173.521 386.866,173.357 391.567,173.357 392.403,172.521 401.758,172.521 401.892,172.386 401.892,172.072 401.478,171.657 J4.H5@401.332,171.657
  Bottom Layer w0.152: v1(383.591,178.876) 383.591,178.897 383.833,179.139 383.833,184.186 383.996,184.35 386.667,187.02 393.594,187.02 393.909,187.335 394.02,187.447 394.02,187.576 393.047,188.549 393.047,188.91 393.728,189.591 394.089,189.591 395.775,187.905 395.904,187.905 396.422,188.422 396.422,188.551 394.736,190.237 394.736,190.598 395.417,191.279 395.777,191.279 397.463,189.593 397.593,189.593 398.11,190.11 398.11,190.24 396.424,191.926 396.424,192.286 397.105,192.967 397.466,192.967 399.152,191.281 399.281,191.281 399.798,191.799 399.798,191.928 399.33,192.396 399.33,192.757 400.256,193.683 400.317,193.744 400.317,195.179 400.317,195.337 400.226,195.428 398.5,195.428 398.244,195.683 398.244,196.646 398.5,196.901 401.004,196.901 401.096,196.993 401.096,197.724 401.004,197.816 400.572,197.816 400.317,198.071 400.317,199.577 400.219,199.676 399.196,200.699 397.054,200.699 396.357,200.002 396.357,197.161 396.14,196.944 395.248,196.944 395.158,196.855 395.158,196.623 R25.2@394.945,196.409
BP_IO.LVDS_N7: J4.F6 R27.2 | length 84.3
  TopLayer w0.152: v1(396.247,194.123) 396.279,194.123 396.51,194.354 396.732,194.354 397.141,193.945 397.334,193.752 397.695,193.752 399.23,195.287 399.36,195.287 399.877,194.77 399.877,194.64 396.589,191.353 396.589,190.992 397.27,190.311 397.631,190.311 400.919,193.599 401.048,193.599 401.565,193.082 401.565,192.952 398.278,189.665 398.278,189.304 398.959,188.623 399.319,188.623 402.607,191.911 402.736,191.911 403.254,191.393 403.254,191.264 399.966,187.976 399.966,187.616 400.647,186.935 401.008,186.935 404.295,190.222 404.425,190.222 404.942,189.705 404.942,189.576 401.654,186.288 401.654,185.927 402.335,185.246 402.696,185.246 404.203,186.753 404.332,186.753 404.691,186.395 404.793,186.293 404.793,185.717 404.793,185.443 405.048,185.188 406.446,185.188 406.537,185.097 406.537,184.365 406.446,184.274 402.517,184.274 402.262,184.019 402.262,183.056 402.517,182.801 406.446,182.801 406.537,182.709 406.537,181.978 406.446,181.886 402.517,181.886 402.262,181.631 402.262,180.668 402.517,180.413 406.446,180.413 406.537,180.322 406.537,179.59 406.446,179.499 405.048,179.499 404.793,179.244 404.793,178.767 404.793,178.362 404.554,178.123 v1(404.554,178.098)
  Bottom Layer w0.152: R27.2@394.945,194.034 394.945,194.054 395.158,194.268 395.178,194.268 395.299,194.389 395.969,194.389 396.234,194.123 v1(396.247,194.123) ; J4.F6@404.232,173.657 404.403,173.657 404.869,174.124 404.869,177.783 v1(404.554,178.098)
BP_IO.LVDS_N8: J4.C6 R29.2 | length 84.9
  TopLayer w0.152: v1(377.871,224.552) 377.871,224.577 377.632,224.815 377.632,225.87 379.613,227.851 393.14,227.851 395.187,225.803 395.187,201.859 407.687,189.359 407.687,177.142 407.769,177.061 408.739,176.091 408.962,175.868 408.962,174.274 408.507,173.819 408.432,173.819 J4.C6@408.432,173.657
  Bottom Layer w0.152: R29.2@376.148,219.553 376.225,219.553 376.351,219.679 376.351,219.704 376.441,219.793 377.1,219.793 377.638,220.331 377.638,222.52 377.645,222.527 377.645,224.289 377.871,224.515 v1(377.871,224.552)
BP_IO.LVDS_N9: J4.L6 R31.2 | length 84
  TopLayer w0.152: v1@380.403,222.573 380.403,222.633 380.607,222.836 386.358,222.836 392.1,222.836 392.864,222.073 392.864,190.64 392.878,190.626 392.878,190.544 393.041,190.38 396.394,187.027 396.394,182.373 396.394,181.948 396.649,181.693 397.683,181.693 397.774,181.602 397.774,180.87 397.683,180.779 394.737,180.779 394.482,180.523 394.482,179.56 394.737,179.305 397.683,179.305 397.774,179.214 397.774,178.482 397.683,178.391 394.737,178.391 394.482,178.136 394.482,177.173 394.737,176.918 396.303,176.918 396.394,176.826 396.394,176.668 396.394,176.553 396.395,176.551 396.395,174.069 396.088,173.762 396.088,173.657 J4.L6@395.832,173.657
  Bottom Layer w0.152: R31.2@375.982,217.024 376.262,217.024 376.374,217.136 376.374,217.168 376.463,217.257 377.156,217.257 377.32,217.421 378.586,218.688 378.75,218.851 378.75,221.802 379.788,222.84 380.08,222.84 380.348,222.573 v1@380.403,222.573
  other v1: 380.343,222.573
BP_IO.LVDS_N10: J4.I6 R33.2 | length 84
  TopLayer w0.152: v1(382.182,223.923) 382.182,223.963 381.958,224.186 381.958,225.256 382.505,225.803 392.521,225.803 394.213,224.111 394.213,191.178 400.629,184.763 400.629,176.818 400.632,176.815 400.632,174.258 J4.I6@400.032,173.657
  Bottom Layer w0.152: R33.2@376.127,211.809 376.156,211.809 376.434,212.087 378.784,212.087 381.634,214.937 381.634,223.16 381.737,223.263 381.901,223.427 381.901,223.66 382.164,223.923 v1(382.182,223.923)
BP_IO.LVDS_N11: J5.E1 R35.2 | length 84
  TopLayer w0.152: v1(391.176,242.082) 391.197,242.082 391.439,242.324 392.085,242.324 392.848,241.561 405.828,241.561 405.83,241.559 406.21,241.179 406.21,241.053 405.996,240.839 405.712,240.839 J5.E1@405.531,240.658
  Bottom Layer w0.152: R35.2@376.073,209.259 376.137,209.259 376.328,209.45 376.328,209.481 376.417,209.57 379.719,209.57 382.067,211.918 383.113,212.964 383.195,213.046 383.195,229.604 383.031,229.768 379.867,232.931 372.617,232.931 370.403,235.145 370.403,240.617 372.135,242.349 390.854,242.349 391.082,242.122 391.082,242.082 v1(391.176,242.082)
BP_IO.LVDS_N12: J5.B1 R38.2 | length 84.4
  Bottom Layer w0.152: R38.2@376.112,204.031 376.366,204.285 376.366,204.455 376.455,204.544 378.074,204.544 384.25,210.72 384.25,230.631 384.25,230.749 380.744,234.254 376.069,234.254 375,235.324 375,240.014 376.235,241.249 388.852,241.249 389.728,240.374 392.627,240.374 393.712,241.459 410.112,241.459 410.285,241.285 410.285,241.159 409.784,240.658 J5.B1@409.731,240.658
BP_IO.LVDS_N13: J5.K1 R41.2 | length 83.6
  TopLayer w0.152: J5.K1@397.131,240.658 397.244,240.658 397.244,240.545 397.655,240.133 397.655,238.869 395.837,237.05 395.837,236.233 396.716,235.353 397.688,235.353 397.881,235.16 v1(397.951,235.16)
  Bottom Layer w0.152: R41.2@376.16,201.619 376.16,201.639 376.374,201.853 376.443,201.853 376.567,201.977 382.483,201.977 385.058,204.552 385.222,204.716 385.222,231.602 385.058,231.766 381.442,235.381 376.967,235.381 376.117,236.231 376.117,239.531 376.592,240.006 387.726,240.006 392.313,235.419 397.688,235.419 397.947,235.16 v1(397.951,235.16)
BP_IO.LVDS_N14: J5.H1 R43.2 | length 81.3
  TopLayer w0.152: v1(399.759,232.301) 399.759,232.349 399.974,232.564 399.974,234.161 400.056,234.243 400.171,234.358 401.85,236.037 401.85,240.139 J5.H1@401.331,240.658
  Bottom Layer w0.152: R43.2@376.185,200.105 376.185,200.085 376.399,199.871 376.419,199.871 376.537,199.753 381.802,199.753 385.917,203.868 385.917,229.842 386.824,230.749 387.164,230.749 387.38,230.749 ccw(c387.38,230.982) 387.613,230.982 387.613,231.759 cw(c388.126,231.759) 388.126,232.273 388.827,232.273 cw(c388.827,231.759) 389.341,231.759 389.341,229.458 ccw(c389.574,229.458) 389.574,229.225 390.275,229.225 ccw(c390.275,229.458) 390.509,229.458 390.509,231.759 cw(c391.022,231.759) 391.022,232.273 391.723,232.273 cw(c391.723,231.759) 392.236,231.759 392.236,229.458 ccw(c392.47,229.458) 392.47,229.225 393.171,229.225 ccw(c393.171,229.458) 393.405,229.458 393.405,231.759 cw(c393.918,231.759) 393.918,232.273 394.619,232.273 cw(c394.619,231.759) 395.132,231.759 395.132,229.458 ccw(c395.365,229.458) 395.365,229.225 396.066,229.225 ccw(c396.066,229.458) 396.3,229.458 396.3,231.759 cw(c396.813,231.759) 396.813,232.273 397.514,232.273 cw(c397.514,231.759) 398.027,231.759 398.027,230.982 ccw(c398.261,230.982) 398.261,230.749 399.084,230.749 399.99,231.654 399.99,232.038 399.759,232.268 v1(399.759,232.301)
BP_IO.LVDS_N15: J4.F2 R45.2 | length 83.6
  Bottom Layer w0.152: R45.2@376.138,193.945 376.138,193.965 376.351,194.179 376.371,194.179 376.499,194.306 381.046,194.306 381.382,193.971 381.681,193.671 381.681,191.492 cw(c381.447,191.492) 381.447,191.259 380.217,191.259 ccw(c380.217,190.746) 379.704,190.746 379.704,190.045 ccw(c380.217,190.045) 380.217,189.531 382.728,189.531 cw(c382.728,189.298) 382.961,189.298 382.961,188.597 cw(c382.728,188.597) 382.728,188.363 380.057,188.363 ccw(c380.057,187.85) 379.544,187.85 379.544,187.149 ccw(c380.057,187.149) 380.057,186.636 382.728,186.636 cw(c382.728,186.402) 382.961,186.402 382.961,185.701 cw(c382.728,185.701) 382.728,185.467 380.057,185.467 ccw(c380.057,184.954) 379.544,184.954 379.544,184.253 ccw(c380.057,184.253) 380.057,183.74 382.728,183.74 cw(c382.728,183.507) 382.961,183.507 382.961,182.806 cw(c382.728,182.806) 382.728,182.572 380.057,182.572 ccw(c380.057,182.059) 379.544,182.059 379.544,181.358 ccw(c380.057,181.358) 380.057,180.845 382.728,180.845 cw(c382.728,180.611) 382.961,180.611 382.961,179.91 cw(c382.728,179.91) 382.728,179.676 381.128,179.676 ccw(c381.128,179.163) 380.615,179.163 380.615,178.462 ccw(c381.128,178.462) 381.128,177.949 382.243,177.949 cw(c382.243,177.715) 382.477,177.715 382.477,177.014 cw(c382.243,177.014) 382.243,176.781 380.057,176.781 ccw(c380.057,176.268) 379.544,176.268 379.544,175.567 ccw(c380.057,175.567) 380.057,175.053 381.438,175.053 cw(c381.438,174.556) 381.79,174.907 381.907,174.791 390.099,166.599 404.679,166.599 404.797,166.481 404.797,166.214 404.241,165.657 J4.F2@404.232,165.657
BP_IO.LVDS_P0: J4.D3 R13.2 | length 85.4
  TopLayer w0.152: v1(399.745,220.285) 399.787,220.285 400.008,220.063 406.91,220.063 407.845,219.129 407.845,213.494 406.651,212.3 406.549,212.3 406.543,212.295 399.795,212.295 398.157,210.657 398.157,206.782 411.252,193.687 411.252,188.572 411.551,188.273 v1(411.561,188.273)
  Bottom Layer w0.152: R13.2@394.92,220.434 394.92,220.414 395.133,220.2 395.153,220.2 395.267,220.087 399.482,220.087 399.68,220.285 v1(399.745,220.285) ; J4.D3@406.932,167.657 406.89,167.657 406.34,168.208 406.34,168.376 406.438,168.475 412.064,168.475 412.391,168.801 412.391,178.281 411.244,179.428 411.244,188.002 411.514,188.273 v1(411.561,188.273)
BP_IO.LVDS_P1: J4.A3 R14.2 | length 84.7
  TopLayer w0.152: v1(398.76,217.848) 398.968,217.639 405.783,217.639 406.616,216.806 406.616,214.543 405.77,213.697 399.669,213.697 396.661,210.69 396.661,204.473 399.484,201.651 399.585,201.549 399.592,201.543 399.729,201.528 400.161,201.874 400.218,201.874 400.518,201.841 400.558,201.801 401.123,201.095 401.123,201.039 401.09,200.739 401.05,200.699 399.901,199.778 399.887,199.649 400.344,199.078 400.473,199.064 401.654,200.011 401.711,200.011 402.011,199.978 402.051,199.938 402.616,199.232 402.616,199.175 402.583,198.875 402.543,198.835 401.394,197.914 401.38,197.786 401.837,197.215 401.965,197.201 402.878,197.932 402.935,197.932 403.235,197.899 403.287,197.848 403.331,197.803 403.455,197.68 409.39,191.744 409.39,179.424 412.444,176.371 412.444,168.948 412.005,168.51 410.697,168.51 410.572,168.384 410.572,168.126 411.04,167.657 411.043,167.657 J4.A3@411.132,167.657
  Bottom Layer w0.152: R14.2@394.945,217.923 394.945,217.903 395.27,217.577 398.49,217.577 v1(398.76,217.848) v1@398.855,217.943
BP_IO.LVDS_P2: J4.B4 R16.2 | length 84.5
  TopLayer w0.152: v1@391.721,171.777 391.68,171.777 391.431,171.528 391.431,171.049 391.576,170.904 408.804,170.904 409.272,170.436 409.272,170.111 409.725,169.657 J4.B4@409.832,169.657
  Bottom Layer w0.152: v1@391.721,171.871 391.721,171.904 391.35,172.275 391.35,175.622 391.348,175.624 393.482,177.757 396.306,177.757 400.365,181.816 401.171,181.816 410.936,191.582 410.936,204.869 409.243,206.562 399.778,206.562 397.711,208.628 397.711,211.676 396.924,212.463 395.269,212.463 R16.2@394.945,212.788
  other v1: 391.721,171.821
BP_IO.LVDS_P3: J4.K4 R18.2 | length 83.7
  Bottom Layer w0.152: R18.2@394.945,210.283 394.945,210.263 395.29,209.918 396.117,209.918 396.643,209.392 396.643,208.142 399.598,205.187 408.436,205.187 409.694,203.929 409.694,193.571 409.694,193.546 409.023,192.875 408.662,192.875 408.491,193.046 408.362,193.046 407.845,192.528 407.845,192.399 408.804,191.44 408.804,191.079 408.123,190.398 407.762,190.398 406.803,191.357 406.673,191.357 406.156,190.84 406.156,190.711 407.115,189.752 407.115,189.391 406.434,188.71 406.074,188.71 405.115,189.669 404.985,189.669 404.468,189.152 404.468,189.022 405.427,188.063 405.427,187.703 404.746,187.022 404.385,187.022 403.426,187.981 403.297,187.981 402.78,187.463 402.78,187.334 403.739,186.375 403.739,186.014 403.058,185.333 402.697,185.333 401.738,186.292 401.609,186.292 401.091,185.775 401.091,185.646 401.262,185.475 401.262,185.114 401.069,184.921 395.289,179.141 391.986,179.141 391.977,179.132 388.795,175.95 388.795,172.199 391.065,169.929 392.564,169.929 393.431,170.796 396.564,170.796 396.897,170.462 396.897,170.22 397.232,169.885 J4.K4@397.232,169.657
BP_IO.LVDS_P4: J4.H4 R20.2 | length 82.4